# Altium PCB PCB1.PcbDoc
Units mil, origin at the board's own origin, x right, y up, seen from the top; angles counter-clockwise.
Board outline 6000 x 4000 mil, 2 copper layers (Top Layer, Bottom Layer); 68 components, 39 nets, 229 pads, 21 vias.
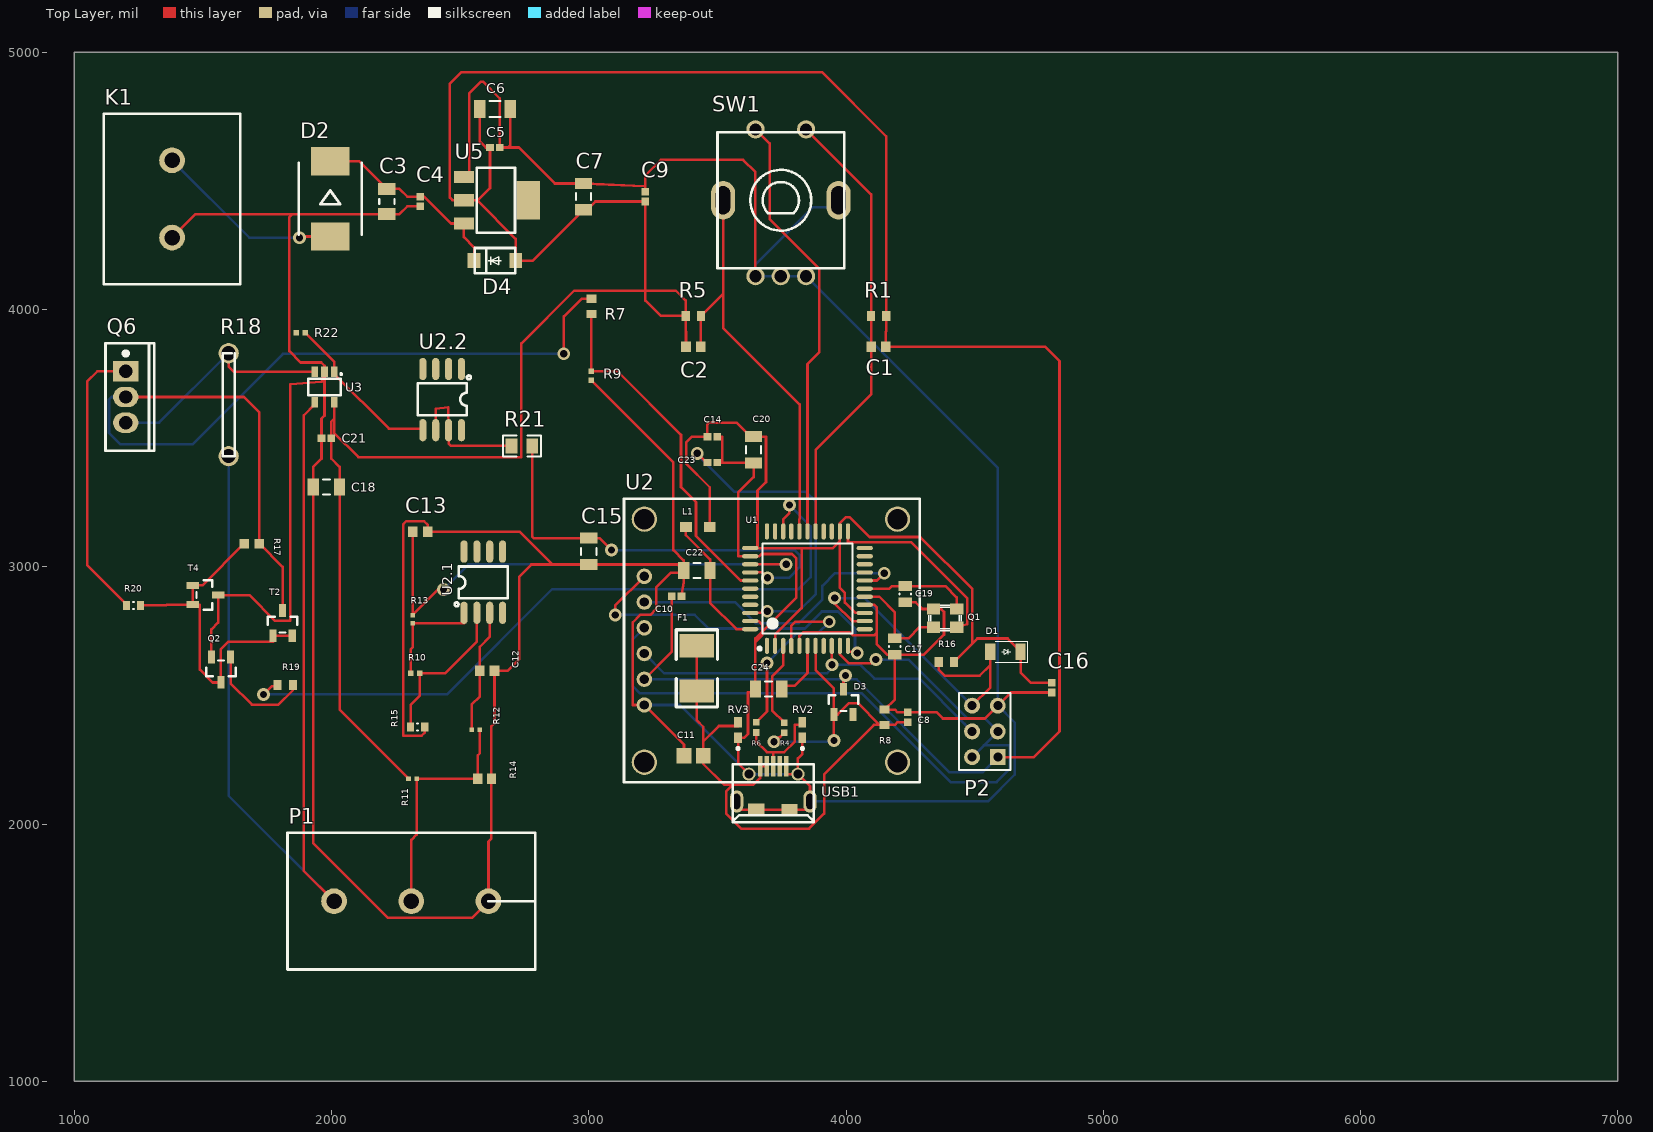
[diagram p0: Top Layer view]
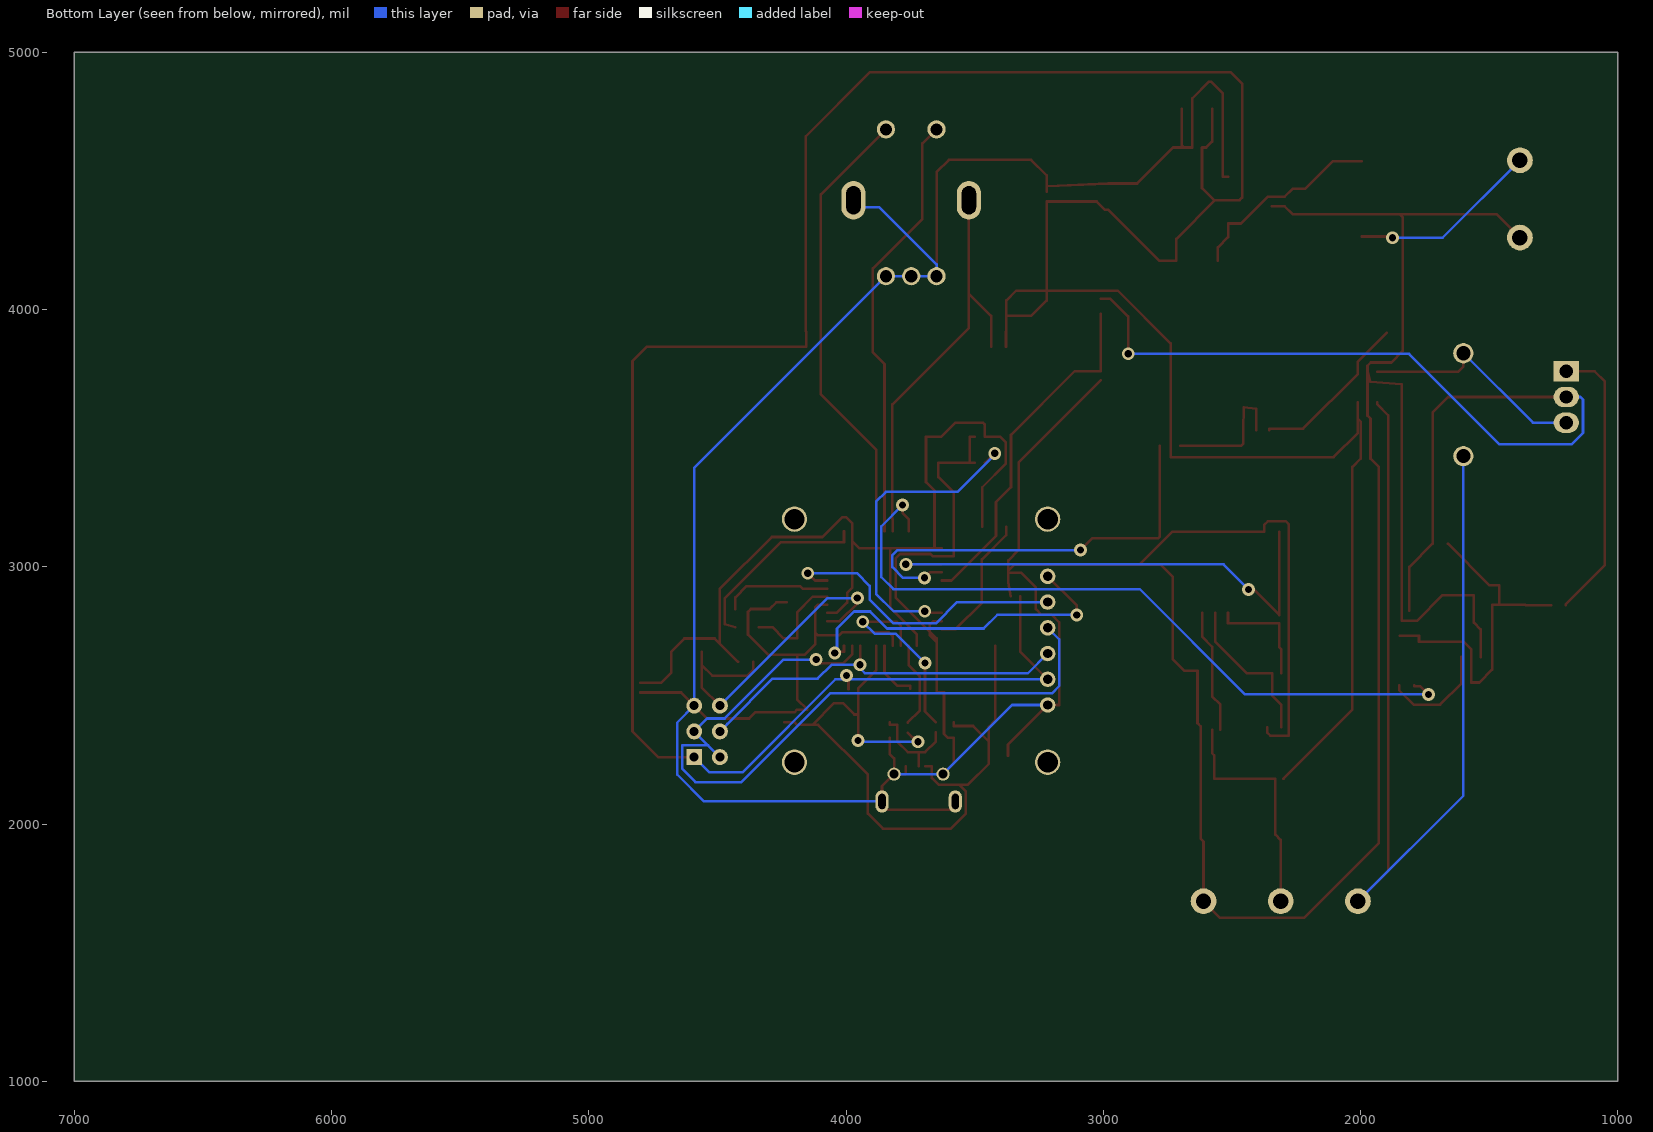
[diagram p1: Bottom Layer view, seen from below]

## Layer stack, top to bottom
Top Solder: solder mask 0.4, Solder Resist, Dk 3.5
Top Layer: signal copper 1.4
Dielectric 1: dielectric 12.6, FR-4, Dk 4.8
Bottom Layer: signal copper 1.4
Bottom Solder: solder mask 0.4, Solder Resist, Dk 3.5

## Board outline
1000,1000 7000,1000 7000,5000 1000,5000

## Design rules (kind name [scope] priority, off if disabled: settings)
Clearance [All] p1: gap=10 ignorepadtopadclearanceinfootprint=FALSE except(0: Arc-Hole Track-Hole SMDPad-Hole THPad-Hole Via-Hole Fill-Hole Poly-Hole Region-Hole Text-Hole)
PolygonConnect [All] p1: connectstyle=Relief reliefconductorwidth=10 reliefentries=4 polygonreliefangle="90 Angle" airgapwidth=10
RoomDefinition soldeerstation_Schematic [InComponentClass('soldeerstation_Schematic')] p1: confinementstyle=ConfineIn formatcopy=TRUE lockcomponents=FALSE outline 11270,0 28455,0 28455,1275 11270,1275
RoutingVias [All] p1: holewidth=28 width=50 viastyle="Through Hole" minholewidth=28 minwidth=50 maxholewidth=28 maxwidth=50
SolderMaskExpansion [All] p1: expansion=4 istentingtop=FALSE
Width [All] p1: maxlimit=10 minlimit=10 preferedwidth=10
30 further rules are at their usual default settings.

## Components (designator, comment, footprint, x,y, rotation, side; value= is the part's Value field where it differs from the comment)
C1 "GRM188R71H103KA01D" CAPC1608X90X35ML10T15 4126.46,3855 r0 top
C2 "GRM188R71H103KA01D" CAPC1608X90X35ML10T15 3406.46,3855 r180 top
C3 "CL31B106KLHNNNE" CAPC3216X180X50LL20T30 2215,4420 r90 top
C4 "C0402C104K8PACTU" CAPC1005X60X30ML05T10 2345,4420 r90 top
C5 "C0402C104K8PACTU" CAPC1005X60X30ML05T10 2635,4630 r180 top
C6 "CAP 47uF 10V 1206(3216)" CAPC1206(3216)190_N 2635.94,4780 r180 top value=47uF
C7 "C1206C106K8RACTU" CAPC3216X180X50LL20T25 2980,4438.82 r270 top
C8 "C0402C104K8PACTU" CAPC1005X60X30ML05T10 4240.31,2415 r270 top
C9 "C0402C104K8PACTU" CAPC1005X60X30ML05T10 3220,4438.9 r270 top
C10 "C0402C104K8PACTU" CAPC1005X60X30ML05T10 3341.42,2885 r180 top
C11 "GRM219R61A226MEA0D" CAPC2013X95X45ML15T25 3407.72,2265 r0 top
C12 "GRM188R71H103KA01D" CAPC1608X90X35ML10T15 2605,2596.46 r180 top
C13 "GRM188R71H103KA01D" CAPC1608X90X35ML10T15 2345,3136.46 r180 top
C14 "C0402C104K8PACTU" CAPC1005X60X30ML05T10 3480.32,3505 r180 top
C15 "12061C105KAT2A" CAPC3216X180X50LL20T25 3000,3060 r90 top
C16 "C0402C104K8PACTU" CAPC1005X60X30ML05T10 4800,2530 r90 top
C17 "CAP 22pF 50V 0805(2012)" CAPC0805(2012)100_L 4190,2690 r90 top value=22pF
C18 "C1206C106K8RACTU" CAPC3216X180X50LL20T25 1980,3310 r0 top
C19 "CAP 22pF 50V 0805(2012)" CAPC0805(2012)100_L 4230.31,2893.5 r90 top value=22pF
C20 "C1206C106K8RACTU" CAPC3216X180X50LL20T25 3640.32,3455 r90 top
C21 "C0402C104K8PACTU" CAPC1005X60X30ML05T10 1980,3500 r0 top
C22 "12061C105KAT2A" CAPC3216X180X50LL20T25 3420.32,2985 r180 top
C23 "C0402C104K8PACTU" CAPC1005X60X30ML05T10 3480.32,3405 r180 top
C24 "12061C105KAT2A" CAPC3216X180X50LL20T25 3699.13,2525 r0 top
D1 "CD1206-S01575" D-1206 4620,2670 r180 top
D2 "MBRS540T3G" SMC 1995,4430 r270 top
D3 "BAT54" SOT-23(SOT-23-3) 3990.32,2475 r0 top
D4 "S1A" SMA(DO-214AC) 2635,4190 r180 top
F1 "MF-MSMF050-2" 1812 3420.32,2605 r90 top
K1 "WJ25C-B-2P" WJ25C-B-7.62-2P 1380,4429.9 r0 top
L1 "74279206" SMD-0805 3424.06,3155 r180 top
P1 "WJ25C-B-7.62-3P-13-00A" WJ25C-B-7.62-3P 2309.99,1700 r90 top
P2 "Header-Male-2.54_2x3" HDR-3X2/2.54 4540,2360 r90 top
Q1 "KX-7" KX-7 4430.31,2765 r180 top
Q2 "BC847C" SOT-23(SOT-23-3) 1570,2600 r180 top
Q6 "IRF9540NPBF" TO-220(TO-220-3) 1200,3660 r0 top
R1 "RC0603FR-0710KL" RESC1608X55X25ML10T15 4126.93,3975 r0 top
R4 "ERJ-2RKF22R0X" RESC1005X40X25ML05T05 3760.32,2374.68 r90 top
R5 "RC0603FR-0710KL" RESC1608X55X25ML10T15 3406.46,3975 r180 top
R6 "ERJ-2RKF22R0X" RESC1005X40X25ML05T05 3650.32,2375.31 r90 top
R7 "RC0603FR-0710KL" RESC1608X55X25ML10T15 3010,4012.28 r90 top
R8 "RC0603FR-0710KL" RESC1608X55X25ML10T15 4150.31,2415 r270 top
R9 "ERJ2RKF2701X" RESC1005X40X25NL05T05 3010,3742.28 r90 top
R10 "ERJ2RKF1802X" RESC1005X40X25NL05T05 2325,2586.46 r0 top
R11 "ERJ-2RKF1004X" RESC1005X40X25LL05T05 2315,2176.46 r180 top
R12 "ERJ2RKF5601X" RESC1005X40X25LL05T05 2560.75,2366.46 r0 top
R13 "ERJ2RKF5601X" RESC1005X40X25LL05T05 2315,2796.46 r270 top
R14 "CRCW060310M0FKEA" RESC1609X50X30ML10T20 2595,2176.46 r180 top
R15 "91R 1% 0603(1608)" RESC0603(1608)_L 2335,2376.46 r0 top value="91.00 Ohm"
R16 "RC0603FR-0710KL" RESC1608X55X25ML10T15 4390,2630 r0 top
R17 "ERJ-3EKF4701V" RESC1608X55X30NL15T15 1690,3090 r0 top
R18 "0.02" LR12DL1020LJ 1600,3630 r270 top
R19 "RC0603FR-0710KL" RESC1608X55X25ML10T15 1820,2540 r0 top
R20 "91R 1% 0603(1608)" RESC0603(1608)_L 1230,2850 r180 top value="91.00 Ohm"
R21 "100K" 0805 2740,3470 r180 top
R22 "ERJ2RKF5603X" RESC1005X40X25NL05T05 1880,3910 r0 top
RV2 "CG0603MLC-05E" BOUR-CG0603-2_V 3830.32,2365 r90 top
RV3 "CG0603MLC-05E" BOUR-CG0603-2_V 3580.32,2365 r90 top
SW1 "PEC11R-4015F-S0024" BOURNS_PEC11R-4XXXF-SXXXX 3746.46,4415 r0 top
T2 "BC847C" SOT-23(SOT-23-3) 1810,2780.8 r0 top
T4 "BC857C" SOT-23(SOT-23-3) 1510,2890 r270 top
U1 "ATMEGA32U4-AU" QFP-44_10X10X08P 3850.32,2915 r90 top
U2 "Oled_0.96" OLED_0.96'' 3216.06,2712.67 r90 top
U2.1 "MCP6002T-E/SN" SOIC-8_150MIL 2590,2940 r90 top
U2.2 "MCP6002T-E/SN" SOIC-8_150MIL 2430,3650 r270 top
U3 "INA138NA250" SOT-23-5 1972.6,3699.05 r270 top
U5 "NCP1117ST50T3G" SOT-223 2639.53,4425 r0 top
USB1 "micro USB_B Female" MICRO-USB-1 3717.49,2139.88 r270 top

## Footprints (in the part's own frame and the unit in brackets; to place one, negate y for a bottom-side part, rotate by r counter-clockwise, add the part's x,y. Pads: shape width x height; smd on the part's side, far side on the other; paste and mask are expansions set on the pad)
0805 [mil]
  rect 45.67x57.87 smd: 1(-40,0) 2(40,0)
  silkscreen extent -75,-41 74,41
1812 [mil]
  rect 90x133.86 smd: 1(-88,0) 2(88,0)
  silkscreen extent -150,-80 150,80
BOUR-CG0603-2_V [mm] "SMD, 2-Leads, Body 1.6x0.8mm, Pitch 1.52mm"
  rect 1.02x0.76 smd: 1(-0.76,0) 2(0.76,0)
  silkscreen extent -1.94,-0.13 -1.7,0.12, body extent -0.8,-0.4 0.8,0.4, height 0.55
BOURNS_PEC11R-4XXXF-SXXXX [mm]
  round 1.8 hole 1.2: 1(-2.5,7.25) 2(2.5,7.25) A(-2.5,-7.25) B(2.5,-7.25) C(0,-7.25)
  oval 2.4x3.8 hole 1.4 slot 2.8 at 90 deg: MT1(-5.7,0.25) MT2(5.7,0.25)
  silkscreen extent -6.25,-6.45 6.25,6.95
CAPC0805(2012)100_L [mm] "Chip Capacitor, Body 2.0x1.2mm, Height 1.0mm, IPC High Density"
  rect 0.95x1.35 smd: 1(-0.8,0) 2(0.8,0)
  silkscreen extent -0.05,-0.58 0.05,0.58, body extent -1.1,-0.72 1.1,0.72, height 1
CAPC1005X60X30ML05T10 [mm] "Chip Capacitor, 2-Leads, Body 1.00x0.50mm, IPC Low Density"
  rect 0.76x0.72 smd: 1(-0.48,0) 2(0.48,0)
  body extent -0.53,-0.28 0.53,0.27, height 0.6
CAPC1206(3216)190_N [mm] "Chip Capacitor, Body 3.2x1.6mm, Height 1.9mm, IPC Medium Density"
  rect 1.15x1.8 smd: 1(-1.5,0) 2(1.5,0)
  silkscreen extent -0.55,-0.8 0.55,0.8, body extent -1.7,-0.9 1.7,0.9, height 1.9
CAPC1608X90X35ML10T15 [mm] "Chip Capacitor, 2-Leads, Body 1.7x0.9mm, IPC Low Density"
  rect 0.95x1.05 smd: 1(-0.725,0) 2(0.725,0)
  body extent -0.85,-0.45 0.85,0.45, height 0.9
CAPC2013X95X45ML15T25 [mm] "Chip Capacitor, 2-Leads, Body 2.00x1.25mm, IPC Low Density"
  rect 1.45x1.55 smd: 1(-0.95,0) 2(0.95,0)
  body extent -1.08,-0.7 1.07,0.7, height 0.95
CAPC3216X180X50LL20T25 [mm] "Chip Capacitor, 2-Leads, Body 3.20x1.60mm, IPC High Density"
  rect 1.1x1.7 smd: 1(-1.3,0) 2(1.3,0)
  silkscreen extent -0.35,-0.75 0.35,0.75, body extent -1.7,-0.9 1.7,0.9, height 1.8
CAPC3216X180X50LL20T30 [mm] "Chip Capacitor, 2-Leads, Body 3.4x1.8mm, IPC High Density"
  rect 1.2x1.7 smd: 1(-1.25,0) 2(1.25,0)
  silkscreen extent -0.25,-0.75 0.25,0.75, body extent -1.7,-0.9 1.7,0.9, height 1.8
D-1206 [mm]
  rect 1x1.6 smd: 1(1.499,0) 2(-1.5,0)
  silkscreen extent -2.2,-1.03 1,1.02
HDR-3X2/2.54 [mil]
  rect 62x62 hole 35: 1(-100,-50)
  round 62 hole 35: 2(-100,50) 3(0,-50) 4(0,50) 5(100,-50) 6(100,50)
  silkscreen extent -150,-100 150,100
KX-7 [mil]
  rect 51.18x43.31 smd: 1(0,-70.87) 2(90.55,-70.87) 3(90.55,0) 4(0,0)
  silkscreen extent -18,-85 108,14
LR12DL1020LJ [mm]
  round 2 hole 1.4: 1(-5.08,0) 2(5.08,0)
  silkscreen extent -5.1,-0.6 5.1,0.6
MICRO-USB-1 [mm]
  round 1.3 hole 0.9: 0(-1.371,2.431) 0(-1.371,-2.41)
  oval 2.2x1.3 hole 0.7 slot 1.5 at 0 deg: 0(1.329,3.62) 0(1.329,-3.619)
  rect 1.2x1.6 smd: 0(2.14,-1.683) 0(2.156,1.596)
  rect 2x0.45 smd: 1(-2.156,-1.31) 2(-2.156,-0.66) 3(-2.156,-0.01) 4(-2.156,0.64) 5(-2.156,1.29)
  silkscreen extent -2.36,-4 3.4,4
OLED_0.96'' [mil]
  round 60 hole 35.98: 1(-249.98,0.05) 2(-149.98,0.05) 3(-49.98,0.05) 4(50.02,0.05) 5(150.02,0.05) 6(250.02,0.05)
  round 98.42 hole 78.74: ""(-472.48,0.05) ""(-472.48,-984.25) ""(472.42,0.05) ""(472.42,-984.25)
  silkscreen extent -551,-1071 551,79
QFP-44_10X10X08P [mm]
  oval 1.6x0.42 smd: 1(-5.65,4) 2(-5.65,3.2) 3(-5.65,2.4) 4(-5.65,1.6) 5(-5.65,0.8) 6(-5.65,0) 7(-5.65,-0.8) 8(-5.65,-1.6) 9(-5.65,-2.4) 10(-5.65,-3.2) 11(-5.65,-4) 23(5.65,-4) 24(5.65,-3.2) 25(5.65,-2.4) 26(5.65,-1.6) 27(5.65,-0.8) 28(5.65,0) 29(5.65,0.8) 30(5.65,1.6) 31(5.65,2.4) 32(5.65,3.2) 33(5.65,4)
  oval 0.42x1.6 smd: 12(-4,-5.65) 13(-3.2,-5.65) 14(-2.4,-5.65) 15(-1.6,-5.65) 16(-0.8,-5.65) 17(0,-5.65) 18(0.8,-5.65) 19(1.6,-5.65) 20(2.4,-5.65) 21(3.2,-5.65) 22(4,-5.65) 34(4,5.65) 35(3.2,5.65) 36(2.4,5.65) 37(1.6,5.65) 38(0.8,5.65) 39(0,5.65) 40(-0.8,5.65) 41(-1.6,5.65) 42(-2.4,5.65) 43(-3.2,5.65) 44(-4,5.65)
  silkscreen extent -6.08,-4.45 4.45,4.87
RESC0603(1608)_L [mm] "Chip Resistor, Body 1.6x0.8mm, IPC High Density"
  rect 0.7x0.9 smd: 1(-0.7,0) 2(0.7,0)
  silkscreen extent -0.05,-0.35 0.05,0.35, body extent -0.85,-0.47 0.85,0.47, height 0.6
RESC1005X40X25LL05T05 [mm] "Chip Resistor, 2-Leads, Body 1.05x0.55mm, IPC High Density"
  rect 0.45x0.45 smd: 1(-0.4,0) 2(0.4,0)
  body extent -0.53,-0.28 0.53,0.28, height 0.4
RESC1005X40X25ML05T05 [mm] "Chip Resistor, 2-Leads, Body 1.05x0.55mm, IPC Low Density"
  rect 0.65x0.65 smd: 1(-0.5,0) 2(0.5,0)
  body extent -0.53,-0.28 0.53,0.28, height 0.4
RESC1005X40X25NL05T05 [mm] "Chip Resistor, 2-Leads, Body 1.00x0.50mm, IPC Medium Density"
  rect 0.55x0.55 smd: 1(-0.45,0) 2(0.45,0)
  body extent -0.53,-0.27 0.53,0.28, height 0.4
RESC1608X55X25ML10T15 [mm] "Chip Resistor, 2-Leads, Body 1.60x0.80mm, IPC Low Density"
  rect 0.8x1 smd: 1(-0.75,0) 2(0.75,0)
  body extent -0.85,-0.45 0.85,0.45, height 0.55
RESC1608X55X30NL15T15 [mm] "Chip Resistor, 2-Leads, Body 1.75x0.95mm, IPC Medium Density"
  rect 0.95x0.95 smd: 1(-0.75,0) 2(0.75,0)
  body extent -0.87,-0.48 0.87,0.48, height 0.55
RESC1609X50X30ML10T20 [mm] "Chip Resistor, 2-Leads, Body 1.55x0.85mm, IPC Low Density"
  rect 0.9x1.05 smd: 1(-0.675,0) 2(0.675,0)
  body extent -0.82,-0.48 0.82,0.48, height 0.5
SMA(DO-214AC) [mil]
  rect 50x57.9 smd: 1(-81,0) 2(81,0)
  silkscreen extent -78,-49 79,49
SMC [mil]
  rect 110.2x149.6 smd: A(146,0) C(-146,0)
  silkscreen extent -140,-122 140,122
SMD-0805 [mm] "Chip Inductor, 2-Leads, Body 2.0x1.2mm"
  rect 1.15x1 smd: 1(-1.175,0) 2(1.175,0)
  body extent -1,-0.6 1,0.6, height 0.89
SOIC-8_150MIL [mm]
  oval 2.2x0.7 smd: 1(-3.023,1.905) 2(-3.023,0.635) 3(-3.023,-0.635) 4(-3.023,-1.905) 5(3.023,-1.905) 6(3.023,-0.635) 7(3.023,0.635) 8(3.023,1.905)
  silkscreen extent -2.37,-2.41 1.55,2.83
SOT-23(SOT-23-3) [mm]
  rect 0.7x1.25 smd: 1(-0.95,-1.25) 2(0.95,-1.25) 3(0,1.25)
  silkscreen extent -1.46,-0.9 1.46,0.65
SOT-23-5 [mm]
  rect 1.06x0.65 smd: 1(-1.5,0.95) 2(-1.5,0) 3(-1.5,-0.95) 4(1.5,-0.95) 5(1.5,0.95)
  silkscreen extent -1.33,-1.6 0.8,1.71
SOT-223 [mm]
  rect 2x1.2 smd: 1(-3.175,2.3) 2(-3.175,0) 3(-3.175,-2.3)
  rect 2.3x3.8 smd: 4(3.175,0)
  silkscreen extent -1.93,-3.2 1.87,3.2
TO-220(TO-220-3) [mm]
  rect 2.5x2 hole 1.3: 1(0,2.54)
  oval 2.5x2 hole 1.3: 2(0,0) 3(0,-2.54)
  silkscreen extent -2,-5.3 2.8,5.3
WJ25C-B-7.62-2P [mil]
  round 100 hole 60: 1(0,150.1) 2(0,-150.1)
  silkscreen extent -266,-331 266,331
WJ25C-B-7.62-3P [mil]
  round 100 hole 60: 1(0,300.19) 2(0,-0.01) 3(0,-300.2)
  silkscreen extent -266,-481 266,481

## Part data
C1 C2 C12 C13: library part CMP-2100-03642-1, "Chip Capacitor, 10 nF, +/- 10%, 50 V, -55 to 125 degC, 0603 (1608 Metric), RoHS, Tape and Reel", Capacitance=10nF, Case Code (Imperial)=0603, Case Code (Metric)=1608, Dielectric=X7R, Dielectric Material=Ceramic, Insulation Resistance=10GR, Manufacturer=Murata, Max Operating Temperature=125degC, Min Operating Temperature=-55degC, Package Description="2-Pin Surface Mount Device, Body 1.6 x 0.8 mm", Package Quantity=1, Tolerance=10%, Voltage=50V, Case/Package=0603, Datasheet URL=http://search.murata.co.jp/Ceramy/image/img/A01X/G101/ENG/GRM188R71H103KA01-01.pdf, Datasheet Version=42401.0, Depth=0.8mm, Height=0.8mm, Lead Free=LeadFree, Length=1.6mm, Manufacturer URL=http://www.murata.com/, Material=Ceramic, Mount=SurfaceMount, Number of Pins=2, Package Reference=0603, Packaging=TapeandReel, REACH SVHC=Unknown, RoHSCompliant=True, Termination=SMD/SMT, Thickness=0.035inch, Voltage Rating=50V, Voltage Rating (DC)=50V, Width=0.031inch
C3: library part CMP-2000-06108-1, "Chip Capacitor, 10 uF, +/- 10%, 35 V, -55 to 125 degC, 1206 (3216 Metric), RoHS, Tape and Reel", Capacity (elec.)=10µF, Manufacturer="Samsung Electro-Mechanics", Nominal voltage=35V, Package Description="2-Pin Surface Mount Device, Body 3.2 x 1.6 mm", Package Reference=1206, Tolerance=10%, Category=Ceramiccapacitor, Content=2000pc(s), Datasheet URL=http://www.samsungsem.com/kr/support/product-search/mlcc/__icsFiles/afieldfile/2016/08/18/S_CL31B106KLHNNNE.pdf, Datasheet Version=07/2016, Industrial packaging=Yes, Manufacturer URL=http://www.samsungsem.com/global/index.jsp, Material=Ceramic, Material properties=X7R, Mounting Technology=SurfaceMount, Packaging type=Reel, Type=1206
C4 C5 C8 C9 C10 C14 C16 C21 C23: library part CMP-2008-02046-1, Manufacturer=Kemet, Part Number=C0402C104K8PACTU
C6: library part CMP-1037-05002-1, "CAP 47uF 10V ±20% 1206 (3216 Metric) Thickness 1.9mm SMD", Case-EIA=1206, Case-Metric=3216, Rated Voltage="10 V", Tolerance=Â±20%, Max Thickness="1.9 mm", Technology=SMT
C7 C18 C20: library part CMP-2000-06013-1, "Chip Capacitor, 10 uF, +/- 10%, 10 V, -55 to 125 degC, 1206 (3216 Metric), RoHS, Tape and Reel", Capacitance=10uF, Case Code - in=1206, Case Code - mm=3216, Case Height=1.6mm, Case Length=3.2mm, Dielectric=X7R, Manufacturer=Kemet, Maximum Operating Temperature=+125C, Minimum Operating Temperature=-55C, Operating Temperature Range=-55Cto+125C, Package / Case=1206(3216metric), Package Description="2-Pin Surface Mount Device, Body 3.2 x 1.6 mm", Temperature Coefficient / Code=+/-15%, Tolerance=10%, Voltage Rating=10V, =C1206C106K8RAC7800, Brand=Kemet, Case Width=1.6mm, Class=Class1, Datasheet URL=http://www.kemet.com/docfinder?Partnumber=C1206C106K8RACTU, Datasheet Version=02/2016, Dimensions=1.6mmWx3.2mmLx1.6mmH, Dissipation Factor DF=5, Factory Pack Quantity=2000, Manufacturer URL=http://www.kemet.com/, Mounting Technology=SurfaceMount, Package Reference=1206, Packaging=Reel, Product=GeneralTypeMLCCs, Product Category=MultilayerCeramicCapacitorsMLCC-SMD/SMT, RoHS=Details, Series=C1206C, Termination Style=SMD/SMT, Type=SMDMLCCX7R6.3-250VDCCommericalGrade, Voltage Rating DC=10V
C11: library part CMP-2007-00096-1, Manufacturer=Murata, Part Number=GRM219R61A226MEA0D
C15 C22 C24: library part CMP-2000-05861-1, "Chip Capacitor, 1 uF, +/- 10%, 100 V, -55 to 125 degC, 1206 (3216 Metric), RoHS, Tape and Reel", Capacitance=1µF, Case Size/Dimension=1206, Dielectric=X7R, Manufacturer=AVX, Package Description="2-Pin Surface Mount Device, Body 3.2 x 1.6 mm", Rated Voltage=100V, Tolerance (%)=±10%, Datasheet URL=http://datasheets.avx.com/X7RDielectric.pdf, Datasheet Version=07/2016, Manufacturer URL=http://www.avx.com/, Mounting Technology=SurfaceMount, Package Reference=1206
C17 C19: library part CMP-1036-01245-1, "CAP 22pF 50V ±10% 0805 (2012 Metric) Thickness 1mm SMD", Case-EIA=0805, Case-Metric=2012, Rated Voltage="50 V", Tolerance=Â±10%, Max Thickness="1 mm", Technology=SMT
D1 F1 SW1: BOM_Manufacturer=BOURNS, BOM_Supplier=LCSC
  D1: BOM_Manufacturer Part=CD1206-S01575, BOM_Supplier Part=C75465, Contributor=LCSC, spicePre=D
  F1: BOM_Manufacturer Part=MF-MSMF050-2, BOM_Supplier Part=C17313, spicePre=U
  SW1: BOM_Manufacturer Part=PEC11R-4015F-S0024, BOM_Supplier Part=C143789, Contributor=LCSC, spicePre=S
D2: BOM_Manufacturer Part=?, Manufacturer="ON Semiconductor", Contributor=elnarte, nameAlias=Model, spicePre=D, spiceSymbolName=MBRS540T3G
D3 Q2 T2 T4: BOM_Manufacturer=Hottech, BOM_Supplier=LCSC, Contributor=LCSC
  D3: BOM_Manufacturer Part=BAT54, BOM_Supplier Part=C181198, spicePre=D
  Q2 T2: BOM_Manufacturer Part=BC847C, BOM_Supplier Part=C181141, spicePre=Q
  T4: BOM_Manufacturer Part=BC857C, BOM_Supplier Part=C181147, spicePre=Q
D4: BOM_Manufacturer=MDD, BOM_Manufacturer Part=S1A, BOM_Supplier=LCSC, BOM_Supplier Part=C64912, image=//image.lceda.cn/szlcsc/C64912.jpg, spicePre=D
K1 P1: BOM_Manufacturer=ReliaPro, BOM_Supplier=LCSC, spicePre=P
  K1: BOM_Manufacturer Part=WJ25C-B-2P, BOM_Supplier Part=C8422, image=//image.lceda.cn/szlcsc/C8422.jpg
  P1: BOM_Manufacturer Part=WJ25C-B-7.62-3P-13-00A, BOM_Supplier Part=C61583, image=//image.lceda.cn/szlcsc/C61583.jpg
L1: library part CMP-0220-00038-1, "SMD EMI Suppression Ferrite Bead WE-CBF, Z = 30 Ohm", ComponentLink1Description="Manufacturer Link", ComponentLink1URL=http://www.we-online.com, ComponentLink2Description=Datasheet, ComponentLink2URL=http://www.we-online.de/katalog/media/pdf/74279206.pdf, DatasheetVersion=Dec-2005, Impedance="30 Ohm", PackageDescription="Chip Inductor, 2-Leads, Body 2.0 x 1.2 mm", PackageReference=SMD-0805, PackageVersion=2005
P2: BOM_Manufacturer=BOOMELE, BOM_Manufacturer Part=Header-Male-2.54_2x3, BOM_Supplier=LCSC, BOM_Supplier Part=C65114, spicePre=P
Q1: BOM_Manufacturer Part="GEYER 32MHz 10/10", Contributor=bazis.ural, spicePre=Q
Q6: BOM_Manufacturer=IR, BOM_Manufacturer Part=IRF9540NPBF, BOM_Supplier=LCSC, BOM_Supplier Part=C2575, image=//image.lceda.cn/szlcsc/C2575.jpg, spicePre=Q
R1 R5 R7 R8 R16 R19: library part CMP-2100-03664-1, "Chip Resistor, 10 KOhm, +/- 1%, 01 W, -55 to 155 degC, 0603 (1608 Metric), RoHS, Tape and Reel", Case Code (Imperial)=0603, Case Code (Metric)=1608, Manufacturer=Yageo, Max Operating Temperature=155degC, Min Operating Temperature=-55degC, Package Description="2-Pin Surface Mount Device, Body 1.6 x 0.8 mm", Power Rating=100mW, Resistance=10KOhm, Temperature Coefficient=100ppm/degreesC, Tolerance=1%, Voltage Rating=75V, Voltage Rating (DC)=50V, Case/Package=0603, Composition=ThickFilm, Datasheet URL=http://www.yageo.com/NewPortal/yageodocoutput?fileName=/pdf/R-Chip/PYu-RC_Group_51_RoHS_L_5.pdf, Datasheet Version="Rev. 5, 10/2016", Depth=0.8mm, Height=0.45mm, Lead Free=LeadFree, Lead Pitch=0.3mm, Length=1.6mm, Manufacturer URL=http://www.yageo.com/, Military Standard=Not, Number of Pins=2, Package Reference=0603, Packaging=TapeandReel, REACH SVHC=NoSVHC, RoHSCompliant=true, Termination=SMD/SMT, Weight=7.1E-05oz, Width=0.8mm
R4 R6: library part CMP-1665-00027-3, "Chip Resistor, 22 Ohm, +/- 1%, 0.1 W, -55 to 155 degC, 0402 (1005 Metric), RoHS, Tape and Reel", Case Code (Imperial)=0402, Case Code (Metric)=1005, Max Operating Temperature="155 degC", Min Operating Temperature="-55 degC", Package Quantity=10000, Power Rating="100 mW", Resistance="22 Ohm", Tolerance=1%, Voltage Rating="50 V", Case\/Package=0402, ComponentLink1Description="Manufacturer URL", ComponentLink1URL=http://www.panasonic.com/, ComponentLink2Description=Datasheet, ComponentLink2URL=http://industrial.panasonic.com/cdbs/www-data/pdf/RDA0000/AOA0000C86.pdf, DatasheetVersion=04/2015, Height="0.35 mm", Length="1 mm", Mount="Surface Mount", Mounting Technology="Surface Mount", PackageDescription="2-Pin Surface Mount Device, Body 1 x 0.5 mm", PackageReference=0402, Packaging="Tape and Reel", PartNumber=ERJ-2RKF22R0X, Pins=2, REACH SVHC=Yes, RoHSCompliant=true, Weight=2.8E-05oz, Width="0.5 mm"
R9: library part CMP-2002-01138-1, Manufacturer=Panasonic, Part Number=ERJ2RKF2701X
R10: library part CMP-2002-01129-1, Manufacturer=Panasonic, Part Number=ERJ2RKF1802X
R11: library part CMP-2002-00609-3, "Chip Resistor, 1 MOhm, +/- 1%, 100 mW, -55 to 155 degC, 0402 (1005 Metric), RoHS, Tape and Reel", Case Code (Imperial)=0402, Case Code (Metric)=1005, Manufacturer="Basic Passives", Max Operating Temperature="155 degC", Min Operating Temperature="-55 degC", Package Quantity=10000, Power Rating="100 mW", Resistance="1 MOhm", Tolerance=1%, Voltage Rating="50 V", Case\/Package=0402, ComponentLink1Description="Manufacturer URL", ComponentLink1URL=http://www.panasonic.com/, ComponentLink2Description=Datasheet, ComponentLink2URL=http://industrial.panasonic.com/cdbs/www-data/pdf/RDA0000/AOA0000C86.pdf, DatasheetVersion=04/2015, Height="0.35 mm", Length="1 mm", Mount="Surface Mount", Mounting Technology="Surface Mount", PackageDescription="2-Pin Surface Mount Device, Body 1 x 0.5 mm", PackageReference=0402, Packaging="Tape and Reel", PartNumber=ERJ-2RKF1004X, Pins=2, Radiation Hardening=No, REACH SVHC=Yes, RoHSCompliant=true, Weight=2.8E-05oz, Width="0.5 mm"
R12 R13: library part CMP-2002-01160-1, Manufacturer=Panasonic, Part Number=ERJ2RKF5601X
R14: library part CMP-2000-03843-1, Manufacturer="Vishay Dale", Part Number=CRCW060310M0FKEA
R15 R20: library part CMP-1012-00393-1, "91R 0.1W 1% 0603 (1608 Metric)  SMD", Case-EIA=0603, Case-Metric=1608, Power="0.1 W", Tolerance="1 %", Technology=SMT
R17: library part CMP-1665-00059-1, "Precision Thick Film Chip Resistor, 4.7 KOhm, +/- 1%, -55 to 155 degC, 0603 (1608 Metric), RoHS, Tape and Reel", Case Code (Imperial)=1206, Case Code (Metric)=3216, Case\Package=1205, Max Operating Temperature="125 degC", Min Operating Temperature="-55 degC", Package Quantity=1, Power Rating="250 mW", Resistance="220 Ohm", Tolerance=5%, Type (Resistor)="Thick Film", Voltage Rating="50 V", ComponentLink1Description="Manufacturer URL", ComponentLink1URL=http://www.panasonic.com/, ComponentLink2Description=Datasheet, ComponentLink2URL=http://industrial.panasonic.com/cdbs/www-data/pdf/RDA0000/AOA0000C86.pdf, DatasheetVersion=Apr-15, Elements=4, Height="0.024 inch", Length="0.126 inch", Mount="Surface Mount", PackageDescription="2-Pin Surface Mount Device, Body 1.6 x 0.85 mm", PackageReference=0603, Packaging="Tape and Reel", Pins=8, Radiation Hardening=No, REACH SVHC="No SVHC", RoHSCompliant=true, Width="0.063 inch"
R18: BOM_Manufacturer=KOA, BOM_Manufacturer Part=LR12DL1020LJ, BOM_Supplier=LCSC, BOM_Supplier Part=C159865, Contributor=LCSC, nameAlias="Resistance (Ohms)", spicePre=R, spiceSymbolName=LR12DL1020LJ
R21: BOM_Manufacturer=UniOhm, BOM_Manufacturer Part=TC0525F1003T5E, BOM_Supplier=LCSC, BOM_Supplier Part=C57246, nameAlias="Resistance (Ohms)", spicePre=R, spiceSymbolName=TC0525F1003T5E
R22: library part CMP-2002-01162-1, Manufacturer=Panasonic, Part Number=ERJ2RKF5603X
RV2 RV3: library part CMP-0584-00001-2, "ESD Protector, 5 V Supply, -40 to 85 degC, 1.6 x 0.8 x 0.55 mm SMD, RoHS, Tape and Reel", Manufacturer=Bourns, Operating Temperature="-40 to 85 degC", CO="0.5 pF", ComponentLink1Description="Manufacturer URL", ComponentLink1URL=http://www.bourns.com/, ComponentLink2Description=Datasheet, ComponentLink2URL=http://www.bourns.com/data/global/pdfs/MLC.pdf, DatasheetVersion="Rev. S", Mounting Technology="Surface Mount", PackageDescription="2-Pin SMD, Body 1.6 x 0.8 mm, Pitch 1.52 mm", PackageReference=CG0603-2, Packing="Tape and Reel", PartNumber=CG0603MLC-05E, RoHS=TRUE, RT="1 ns", VC="20 V", VDC="5 V", VT="150 V"
U1: BOM_Manufacturer=MICROCHIP, BOM_Manufacturer Part=ATMEGA32U4-AU, BOM_Supplier=LCSC, BOM_Supplier Part=C44854, image=//image.lceda.cn/szlcsc/C44854.jpg, spicePre=U
U2: BOM_Manufacturer Part=Oled_0.96'', Contributor="Ivan K", spicePre=U
U2.1: library part MCP6002T-E/SN_1, BOM_Manufacturer=MICROCHIP, Operating Temperature="-40¡ãC ~ 125¡ãC", BOM_Manufacturer Part=MCP6002T-E/SN, BOM_Supplier=LCSC, BOM_Supplier Part=C125816, spicePre=U, subpart_no=2
U2.2: BOM_Manufacturer=MICROCHIP, Operating Temperature="-40¡ãC ~ 125¡ãC", BOM_Manufacturer Part=MCP6002T-E/SN, BOM_Supplier=LCSC, BOM_Supplier Part=C125816, spicePre=U, subpart_no=1
U3: BOM_Manufacturer=TI, BOM_Manufacturer Part=INA138NA250, BOM_Supplier=LCSC, BOM_Supplier Part=C133804, Contributor=LCSC, spicePre=U
U5: BOM_Manufacturer=ON, BOM_Manufacturer Part=NCP1117ST50T3G, BOM_Supplier=LCSC, BOM_Supplier Part=C17314, image=//image.lceda.cn/szlcsc/C17314.jpg, spicePre=U, timeStamp=1466353290
USB1: BOM_Manufacturer=ValuePro, BOM_Manufacturer Part="micro USBFemale", BOM_Supplier=LCSC, BOM_Supplier Part=C10418, image=//image.lceda.cn/szlcsc/C10418.jpg, spicePre=U

## Via types
v1: diameter 50, hole 28, Top Layer to Bottom Layer, 21 vias

## Nets (pads, with @x,y where several pads share a name; then routed paths per layer and width w, separated by ;. In a path a pad name is that pad's centre, name@x,y a point inside that pad or via, vN(x,y) a via of type N, cw(c..) or ccw(c..) an arc to the next point about the centre after c; other vN are vias at no path point)
5V: C1.2 C2.2 C5.2 C6.2 C7.2 C9.2 C10.2 C18.2 C21.2 D3.3 D4.1 P2.1 R1.2 R5.2 R11.2 U2.2 U3.5 U5.2 | length 13242.9
  Top Layer w10: U3.5 2010,3575.1 ; R11.2 2031.18,2444.53 C18.2 2031.18,3388 1998.9,3420.28 C21.2 1998.9,3564 2010,3575.1 ; C6.2 2576.89,4653.11 2600,4630 C5.2 2616.1,4472.1 2569,4425 2566,4425 ; U2.2 3322.52,2669.19 C10.2 ; C2.2 3377.91,3914 3376.93,3914.98 R5.2 ; D3.3 3990.32,2569.32 v1(3998,2577) ; P2.1 4730,2260 4830,2360 4830,3800 4775,3855 C1.2 4155,3914 4156.46,3915.46 R1.2 4156.46,4673.54 3908,4922 2504,4922 2460,4878 2460,4435 2470,4425 U5.2 2566,4425 ; 2010,3575.1 2010,3520 2104,3426 2738,3426 2738,3868 2943,4073 3220,4073 ; 2566,4425 2716,4275 D4.1 2782.36,4190 C7.2 2993,4387.64 3025.36,4420 C9.2 3220,4073 ; 3220,4073 3220,4035 3280,3975 R5.2 ; 3220,4073 3338.93,4073 3376.93,4035 R5.2
  Bottom Layer w10: U2.2 v1@3983.69,2562.69 ; v1(3998,2577) v1@3983.69,2562.69 ; P2.1 4531,2201 4403,2201 4041.31,2562.69 v1@3983.69,2562.69
GND: C3.1 C4.1 C5.1 C6.1 C7.1 C8.1 C9.1 C10.1 C11.1 C12.1 C13.1 C14.1 C15.1 C16.1 C17.1 C18.1 C19.1 C20.1 C21.1 C22.2 C23.1 C24.1 K1.2 P1.3 P2.5 Q1.2 Q2.2 R8.1 R9.1 R14.1 R15.2 RV2.1 RV3.1 SW1.A SW1.B SW1.C SW1.MT2 T4.3 U1.5 U1.15 U1.35 U1.43 U2.1 U3.2 U5.1 USB1.0 USB1.5 | length 23305.1
  Top Layer w10: K1.2 1470.99,4370.79 1847.79,4370.79 ; Q2.2 1532.6,2756 1559.2,2782.6 T4.3 1681,2890 1781,2790 1839,2790 1839,3709 1962.2,3719.6 U3.2 ; C4.1 2294.31,4401.1 2264,4370.79 C3.1 1847.79,4370.79 ; R15.2 2362.56,2355.56 2350.74,2343.74 2278,2343.74 2278,3165 2290,3177 2360,3177 2373.54,3163.46 C13.1 2731.36,3136.46 2859,3008.82 ; U5.1 2535,4515.55 2535,4840 2581,4886 2589,4886 2653.9,4821.1 C5.1 2685,4630 ; C6.1 2695,4640 2685,4630 ; R9.1 3329,3405.57 3329,3065 3369.13,3024.87 C22.2 ; C9.1 3220,4480 ; C10.1 3369.13,2938.82 C22.2@3369.13,2977 ; C11.1 3370.32,2308.39 U2.1 3171,2462.69 3171,2784 3200,2813 3240,2813 3262,2835 3262,2920 3319,2977 C22.2@3369.13,2977 ; C23.1 3518.82,3405 ; C14.1 3518.82,3505 3518.82,3405 ; USB1.0@3575,2087.57 3575,2055.64 3651.24,2055.64 3715,2055.64 3715.64,2055 3780.32,2055 3860,2055 3860,2087.57 3860,2147.07 USB1.0@3813.2,2193.87 ; RV3.1 RV3.1@3580.32,2335 ; USB1.0@3622.6,2193.87 3580.32,2236.15 RV3.1@3580.32,2335 ; U1.43 3660,2789.02 3675,2774.02 3675,2748.05 ; SW1.A 3648.04,4533.96 3600,4582 3280,4582 3220,4522 3220,4480 ; USB1.5 3768.27,2193.87 USB1.0@3813.2,2193.87 ; U1.5 3818.82,2730.82 3833.83,2745.83 4014.17,2745.83 4026,2734 4110,2734 4120,2744 ; RV2.1 3830.32,2272.12 3813.2,2255 USB1.0@3813.2,2193.87 ; U1.15 4110,2852.01 4120,2842.01 4120,2744 ; C19.1 4271,2862.01 4297.14,2835.87 Q1.2 4370,2835.87 4381,2824.87 4381,2736.5 4303,2658.5 C17.1 ; C16.1 4641.1,2511.1 P2.5 4540,2410 4376.9,2410 4353,2433.9 C8.1 4200.63,2433.9 4190,2444.53 R8.1 4190,2484.21 C17.1 ; 1847.79,4370.79 1836,4359 1836,3838 1880,3794 1960,3794 1972.6,3781.4 U3.2 ; U3.2 1972.6,3587.5 1961.1,3576 C21.1 1961.1,3420.28 1928.82,3388 C18.1 1928.82,1926.18 2220,1635 2545.19,1635 P1.3 2610.19,1932 2621.57,1943.38 R14.1 2621.57,2380 2633.54,2391.97 C12.1 2685.46,2596.46 2729,2640 2729,2961 2776.82,3008.82 2859,3008.82 ; 2685,4630 2728,4630 2868,4490 C7.1 3220,4480 ; 2859,3008.82 C15.1 3345.32,3008.82 C22.2 ; C22.2@3369.13,2977 C22.2 ; 3518.82,3405 3569,3405 3570.18,3403.82 C20.1 3641,3403.82 3641,3349 3581,3289 3581,3040.98 U1.35 3663.49,3040.98 3672,3049.49 3790,3049.49 3807.37,3032.12 3807.37,2880.42 3675,2748.05 ; RV3.1@3580.32,2335 3604,2335 3619,2350 3619,2513 3647.95,2513 C24.1 3647.95,2706.95 ; 3647.95,2706.95 3647.95,2721 3675,2748.05 ; 3647.95,2706.95 3675,2734 3675,2748.05 ; 4120,2744 4120,2698.5 4160,2658.5 C17.1
  Bottom Layer w10: U2.1 3353.78,2462.69 3622.6,2193.87 USB1.0@3813.2,2193.87 ; USB1.0@3860,2087.57 3860,2088 4552,2088 4656,2192 4656,2394 P2.5 4590,3384.46 SW1.B SW1.C SW1.A 3648.04,4175.04 3870,4397 3970.87,4397 SW1.MT2
NetC1_1: C1.1 R1.1 SW1.2 U1.27 | length 1757.3
  Top Layer w10: SW1.2 4097.4,4447.91 R1.1 4097.4,3914.51 4097.91,3914 C1.1 4097.91,3670.1 3881.82,3454 U1.27
NetC2_1: C2.1 R5.1 SW1.MT1 U1.29 | length 1653.4
  Top Layer w10: C2.1 3435,3914 3435.98,3914.98 R5.1 3522.05,4061.06 ; SW1.MT1 3522.05,4061.06 ; U1.29 3818.82,3185 3820,3186.18 3820,3631 3522.05,3928.95 3522.05,4061.06
NetC8_2: C8.2 C11.2 D3.1 F1.1 F1.2 R4.1 R8.2 RV3.2 U1.7 USB1.1 USB1.2 | length 3013.3
  Top Layer w10: F1.2 F1.1 3420.32,2402.8 3445.12,2378 3445.12,2320 ; RV3.2 3580.32,2381 3506.12,2381 3445.12,2320 ; USB1.2 USB1.1 3665.91,2178.91 3640,2153 3560,2153 ; v1(3720,2320) 3738,2338 3743.32,2338 R4.1 ; U1.7 3881.82,2598.1 3952.92,2527 D3.1 ; v1(3952.92,2325) D3.1 ; C8.2 4200.63,2396.1 4190,2385.47 R8.2 R8.2@4131,2385.47 ; 3445.12,2320 C11.2 3445.12,2234 3526.12,2153 3560,2153 ; 3560,2153 3534,2127 3534,2040 3592,1982 3857,1982 3915,2040 3915,2192.47 4108,2385.47 R8.2@4131,2385.47 ; D3.1 3967.8,2425.8 4012,2470 4046.47,2470 R8.2@4131,2385.47
  Bottom Layer w10: v1(3720,2320) 3947.92,2320 v1(3952.92,2325)
NetC12_2: C12.2 R12.1 U2.1.3 | length 483.5
  Top Layer w10: R12.1 2545,2465 2576.46,2496.46 C12.2 2576.46,2689 2615,2727.54 U2.1.3
NetC13_2: C13.2 R13.1 U1.36 | length 1998.4
  Top Layer w10: C13.2 2316.46,2974.46 2315,2973 R13.1 2414.8,2912 v1(2435,2912) ; U1.36 v1(3767.37,3009.49)
  Bottom Layer w10: v1(2435,2912) 2532.49,3009.49 v1(3767.37,3009.49)
NetC14_2: C14.2 C16.2 C20.2 D1.2 L1.1 R16.2 U1.2 U1.14 U1.24 U1.34 | length 3789.2
  Top Layer w10: C14.2 C14.2@3461,3505 ; L1.1 3470.32,3309.14 3378.46,3401 3378.46,3483.46 3400,3505 C14.2@3461,3505 ; U1.34 U1.34@3656,3072.48 ; U1.2 3724.34,2736.59 3827.37,2839.63 3827.37,3071.34 3826.23,3072.48 ; U1.14 4036.49,2820.51 3995.94,2861.06 3995.94,2898 3976.3,2917.64 3976.3,3100 ; R16.2 4490.91,2701.38 ; C16.2 4720,2548.9 4679.07,2589.83 D1.2 4628.07,2721 4510.53,2721 4490.91,2701.38 ; C14.2@3461,3505 3461,3553.82 3467.18,3560 3575.18,3560 3629,3506.18 C20.2 3689,3506.18 3689,3329 3656,3296 U1.34@3656,3072.48 ; U1.34@3656,3072.48 3826.23,3072.48 ; 3826.23,3072.48 3948.78,3072.48 3976.3,3100 ; 3976.3,3100 U1.24 3976.3,3169.59 4000,3193.3 4013.7,3193.3 4091.25,3115.75 4288.25,3115.75 4490.91,2913.09 4490.91,2701.38
NetC15_2: C15.2 R21.1 U1.37 | length 1687
  Top Layer w10: R21.1 2780,3117 2785.82,3111.18 C15.2 3042,3111.18 v1(3088.18,3065) ; U1.37 3674,2977.99 v1(3694.99,2957)
  Bottom Layer w10: v1(3088.18,3065) 3800,3065 3820,3045 3820,2999 3778,2957 v1(3694.99,2957)
NetC17_2: C17.2 Q1.3 U1.16 | length 411.6
  Top Layer w10: U1.16 4129.5,2883.5 4190,2823 C17.2 4243,2721.5 4286.5,2765 Q1.3
NetC19_2: C19.2 Q1.1 U1.17 | length 425.1
  Top Layer w10: U1.17 4168.74,2915 4178.74,2925 C19.2 4386.32,2925 4430.32,2881 Q1.1
NetC22_1: C22.1 L1.2 U1.44 | length 532.9
  Top Layer w10: L1.2 3377.8,3122.52 3471.5,3028.82 C22.1 3471.5,2859.54 3573.52,2757.52 U1.44
NetC23_2: C23.2 U1.42 | length 1243.2
  Top Layer w10: v1(3422,3441) 3458,3405 C23.2 ; U1.42 3668,2820.51 3674.49,2827 v1(3694,2827)
  Bottom Layer w10: v1(3422,3441) 3419,3438 3566,3291 3845,3291 3883,3253 3883,2895 3815,2827 v1(3694,2827)
NetC24_2: C24.2 U1.6 | length 238.1
  Top Layer w10: C24.2 3750.32,2537 3800,2537 3850.32,2587.32 U1.6
NetD1_1: D1.1 P2.6 R16.1 U1.13 | length 1369
  Top Layer w10: v1(3955.94,2878) 3955.94,2858 4024.92,2789.02 U1.13 ; R16.1 4360.47,2600 4383.47,2577 4520,2577 4560.97,2617.97 ; P2.6 4560.97,2530.97 4560.97,2617.97 ; D1.1 4560.97,2617.97
  Bottom Layer w10: v1(3955.94,2878) 4072,2878 P2.6
NetD2_A: D2.A K1.1 | length 741.7
  Top Layer w10: v1(1876,4279) 1881,4284 D2.A
  Bottom Layer w10: K1.1 1681,4279 v1(1876,4279)
NetP1_1: P1.1 R18.2 U3.4 | length 3906.4
  Top Layer w10: U3.4 1935.2,3632 1892,3588.8 1892,1817.8 P1.1
  Bottom Layer w10: R18.2 1600,2109.8 P1.1
NetP1_2: P1.2 R11.1 R12.2 R14.2 | length 916.1
  Top Layer w10: P1.2 2310,1938 2330.75,1958.75 R11.1 R14.2 2568.43,2267 2576.5,2275.07 R12.2
NetP2_2: P2.2 P2.3 U1.10 U2.4 | length 3001.4
  Top Layer w10: U1.10 3976.3,2659.7 4011.32,2624.68 4101.68,2624.68 v1(4116,2639)
  Bottom Layer w10: U2.4 3171,2717.67 3171,2537 3200,2508 4062,2508 4407,2163 4585,2163 4636,2214 4636,2306 4536,2306 ; v1(4116,2639) 4243,2639 4472,2410 4540,2410 P2.3 4536,2306 ; P2.2 4536,2306
NetP2_4: P2.4 U1.9 U2.3 | length 1609.7
  Top Layer w10: U1.9 3944.81,2620.19 v1(3946,2619)
  Bottom Layer w10: U2.3 3292.7,2586 3927,2586 3958,2617 4055.8,2619 ; v1(3946,2619) 4055.8,2619 ; P2.4 4460.89,2389.11 4285.2,2564.8 4110,2564.8 4055.8,2619
NetQ1_4: Q1.4 U1.23 | length 739.2
  Top Layer w10: U1.23 4007.8,3095.75 4253.25,3095.75 4470.91,2878.09 4470.91,2775.91 Q1.4
NetQ2_1: Q2.1 R19.2 | length 422.1
  Top Layer w10: Q2.1 1607.4,2547 1690.69,2463.71 1793.24,2463.71 1849.53,2520 R19.2
NetQ2_3: Q2.3 R17.1 R20.1 T2.1 T2.2 T4.1 T4.2 | length 1370.7
  Top Layer w10: R20.1 1357,2850 1359.6,2852.6 T4.2 ; R17.1 1497.87,2927.4 T4.1 T4.2 ; T2.2 T2.1 1772.6,2709 1599,2709 1570,2680 Q2.3 1570,2550 1538,2550 1488,2600 1488,2852.6 T4.2
NetQ6_1: Q6.1 R20.2 | length 1099.7
  Top Layer w10: Q6.1 1090,3760 1050,3720 1050,3006.38 1202.44,2853.94 R20.2
NetQ6_3: Q6.3 R18.1 U3.3 | length 907.4
  Top Layer w10: R18.1 1600,3778 1620,3758 1935.2,3758 U3.3
  Bottom Layer w10: Q6.3 1330,3560 R18.1
NetR4_2: R4.2 U1.3 | length 335.5
  Top Layer w10: U1.3 3755.83,2616.83 3713,2574 3713,2441.69 R4.2
NetR6_1: R6.1 RV2.2 USB1.3 | length 378.2
  Top Layer w10: R6.1 3650.32,2321.6 3692.62,2279.3 3717.09,2279.3 ; USB1.3 3717.09,2279.3 ; RV2.2 3830.32,2386 3800.08,2386 3800.08,2319.39 3760,2279.3 3717.09,2279.3
NetR6_2: R6.2 U1.4 | length 789.4
  Top Layer w10: R6.2 3693,2437.68 v1(3693,2626) ; U1.4 3787.33,2771.3 3802.03,2786 v1(3934.97,2786)
  Bottom Layer w10: v1(3693,2626) 3807,2740 3888.97,2740 v1(3934.97,2786)
NetR7_1: R7.1 R9.2 U1.38 | length 1373.4
  Top Layer w10: R7.1 R9.2 3111.24,3760 3358.46,3512.78 3358.46,3309.54 3417,3251 3417,3120 3590.5,2946.5 U1.38
NetR10_1: R10.1 R13.2 U2.1.1 | length 437.7
  Top Layer w10: R10.1 2307.28,2679 2315,2686.72 R13.2 2515,2780.71 U2.1.1
NetR10_2: R10.2 R15.1 U2.1.2 | length 609.7
  Top Layer w10: R15.1 2307.44,2463 2342.72,2498.27 R10.2 2442.46,2586.46 2565,2709 U2.1.2
NetR19_1: R19.1 U1.31 | length 2814.6
  Top Layer w10: v1(1736,2504) 1768,2536 1790.47,2536 R19.1 ; U1.31 3755.83,3184 3780,3208.17 v1(3780,3240)
  Bottom Layer w10: v1(1736,2504) 2449,2504 2858,2913 3816,2913 3863,2960 3863,3157 v1(3780,3240)
NetR21_2: R21.2 U2.2.6 U2.2.7 | length 521.8
  Top Layer w10: U2.2.6 2405,3614.14 2454.14,3620 U2.2.7 2455,3480 2465,3470 R21.2
NetR22_2: R22.2 U2.2.5 U3.1 | length 645.7
  Top Layer w10: R22.2 2010,3797.72 U3.1 2010,3750 2223,3537 2355,3537 U2.2.5
NetSW1_1: SW1.1 U1.28 | length 1684.1
  Top Layer w10: SW1.1 3703,4645.47 3703,4352.32 3895.32,4160 3895.32,3833.32 3850.32,3788.32 U1.28
NetU1_11: U1.11 U2.6 | length 1365.7
  Top Layer w10: v1(3102.7,2813) 3102.7,2849.38 U2.6 ; U1.11 4007.8,2669 4040,2669 v1(4044,2665)
  Bottom Layer w10: v1(3102.7,2813) 3412,2813 3465,2760 3840,2760 3906,2826 3969,2826 4035,2760 4035,2674 v1(4044,2665)
NetU1_18: U1.18 U2.5 | length 1165.6
  Top Layer w10: U1.18 4120,2946.5 v1(4148.5,2975)
  Bottom Layer w10: U2.5 3568.31,2862.69 3651,2780 3815,2780 3908.43,2873.43 3908.43,2925.51 3957.92,2975 v1(4148.5,2975)
VCC: C3.2 C4.2 D2.C D4.2 U5.3 | length 780.4
  Top Layer w10: D2.C 2108.21,4576 C3.2 2264,4469.21 2294.31,4438.9 C4.2 2360,4438.9 2464.45,4334.45 U5.3 2514.53,4281.47 2554,4242 D4.2
Vin: Q6.2 R7.2 R17.2 T2.3 | length 3763.4
  Top Layer w10: Q6.2 1659.53,3660 1719.53,3600 R17.2 1810,2999.53 T2.3 ; v1(2903,3828) 2903,3972.81 2972,4041.81 R7.2
  Bottom Layer w10: Q6.2 1145,3660 1135,3650 1135,3520 1179,3476 1459,3476 1811,3828 v1(2903,3828)
pads on no net: D3.2 R22.1 U1.1 U1.8 U1.12 U1.19 U1.20 U1.21 U1.22 U1.25 U1.26 U1.30 U1.32 U1.33 U1.39 U1.40 U1.41 U2. U2.1.4 U2.1.5 U2.1.6 U2.1.7 U2.1.8 U2.2.1 U2.2.2 U2.2.3 U2.2.4 U2.2.8 U5.4 USB1.4